# Altium PCB 电子脚铐便携式主控板V3-改版V1.PcbDoc (part 3 of 3)
Units mm, origin at the board's own origin, x right, y up, seen from the top; angles counter-clockwise.
Board outline 54 x 105 mm, 2 copper layers (Top Layer, Bottom Layer), stack 1.271 mm thick; 103 components, 64 nets, 340 pads, 43 vias.
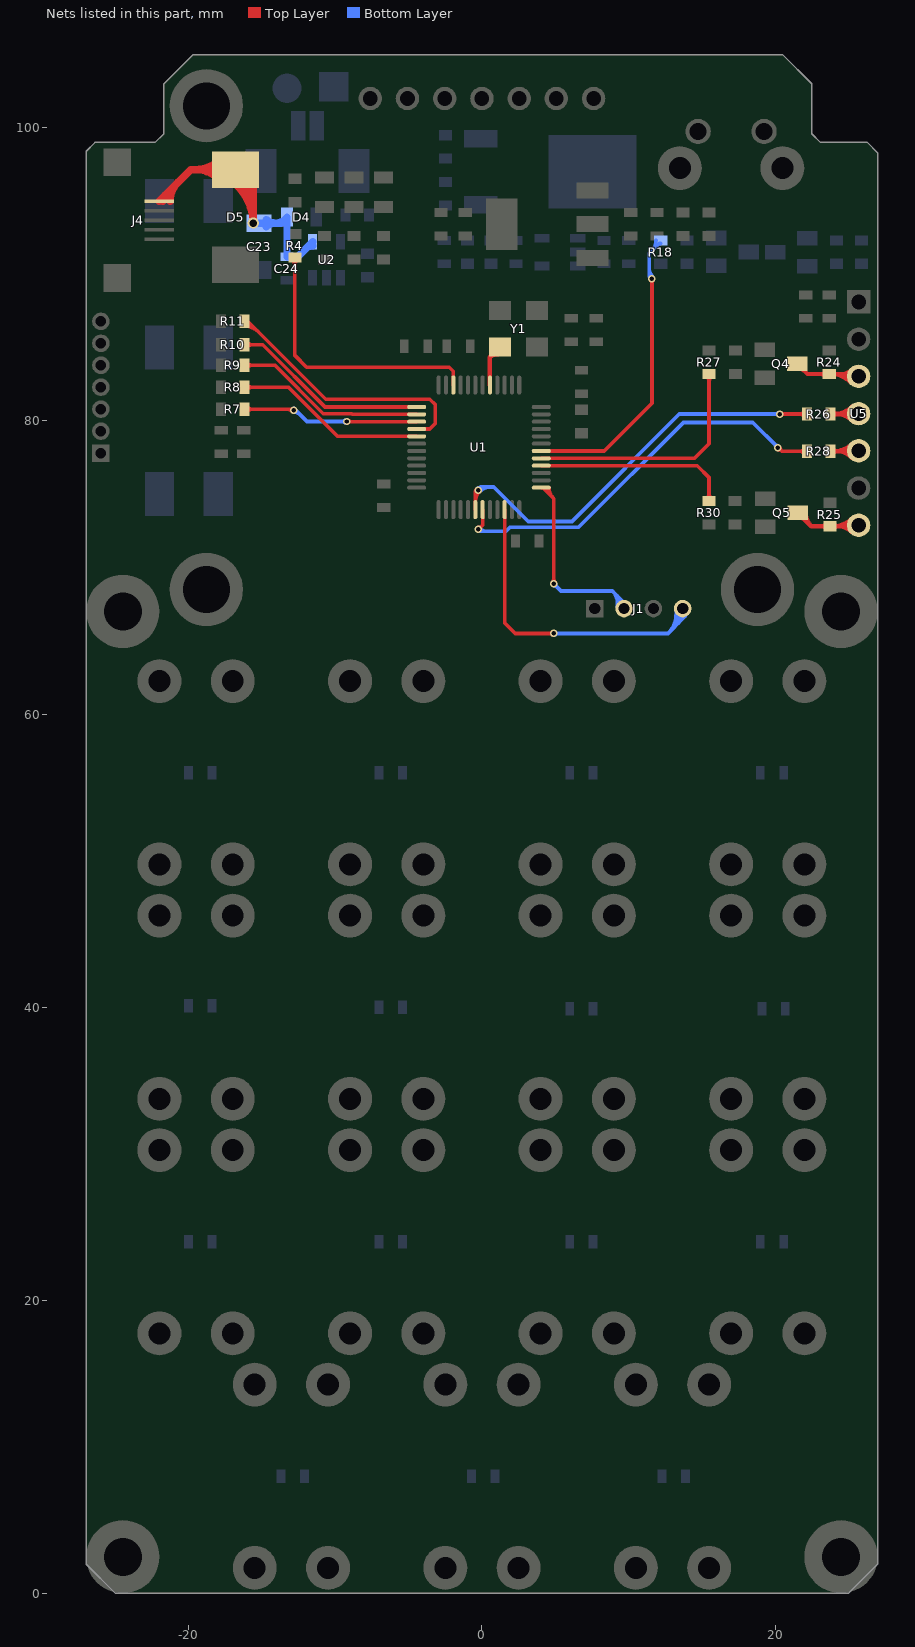
[diagram p3: the nets of this part, all layers, seen from the top]

## Via types
v1: diameter 0.508, hole 0.305, Top Layer to Bottom Layer, tented both sides, 29 vias
v2: diameter 0.762, hole 0.508, Top Layer to Bottom Layer, tented both sides, 14 vias

## Nets (pads, with @x,y where several pads share a name; then routed paths per layer and width w, separated by ;. In a path a pad name is that pad's centre, name@x,y a point inside that pad or via, vN(x,y) a via of type N, cw(c..) or ccw(c..) an arc to the next point about the centre after c; other vN are vias at no path point) (continued)
POWEN: R18.1 U1.42 | length 22.3
  Top Layer w0.254: U1.42@4.05,77.95 8.35,77.95 11.6,81.2 v1(11.6,89.7) ; v1@11.51,89.61 cw(c11.293,89.393) 11.6,89.393 cw(c11.907,89.393) v1@11.69,89.61
  Bottom Layer w0.254: 11.408,90.47 ccw(c12.37,90.47) v1@11.69,89.79 ; 11.564,91.564 ccw(c10.81,92.319) R18.1@11.877,92.319 ; v1(11.6,89.7) 11.408,89.892 11.408,91.408 12.1,92.1 R18.1@12.2,92.1
SETA: R27.2 U1.41 | length 17.5
  Top Layer w0.254: U1.41@4.05,77.45 14.505,77.45 15.5,78.445 R27.2@15.5,83.2 ; R27.2@15.342,83.042 cw(c14.962,82.662) 15.5,82.662 cw(c16.038,82.662) R27.2@15.658,83.042
SETAOUT: Q4.3 R24.1 U5.3 | length 11
  Top Layer w0.254: Q4.3@21.5,83.9 22.2,83.2 ; Q4.3@21.7,83.527 cw(c21.7,83.109) Q4.3@21.995,83.405 ; Q4.3@22.056,83.788 ccw(c22.613,83.613) 22.2,83.2 ; R24.1@23.442,83.042 ccw(c23.062,82.662) 23.062,83.2 ccw(c23.062,83.738) R24.1@23.442,83.358 ; R24.1@23.7,83.2 cw(c23.7,81.056) U5.3@25.222,82.566 ; R24.1@23.958,83.042 cw(c24.338,82.662) 24.338,83.2 cw(c24.338,83.738) R24.1@23.958,83.358 ; 24.31,83.2 cw(c24.31,81.661) U5.3@25.403,82.745 ; 24.462,83.2 ccw(c24.462,84.278) U5.3@25.224,83.516 ; U5.3@25.7,83.04 25.54,83.2 R24.1@23.7,83.2 22.2,83.2
SETB: R30.2 U1.40 | length 14.1
  Top Layer w0.254: U1.40@4.05,76.95 14.697,76.95 15.5,76.147 R30.2@15.5,74.7 ; R30.2@15.336,74.698 ccw(c14.941,75.093) 15.5,75.093 ; 15.5,75.064 ccw(c16.018,75.064) R30.2@15.652,74.698
SETBOUT: Q5.3 R25.1 U5.7 | length 10.7
  Top Layer w0.305: Q5.3@21.547,73.74 22.474,72.813 ; Q5.3@21.747,73.392 cw(c21.747,73.036) Q5.3@21.999,73.288 ; Q5.3@22.095,73.738 ccw(c23.39,73.729) 22.474,72.813 ; R25.1@23.509,72.673 ccw(c23.172,72.336) 23.172,72.813 ccw(c23.172,73.29) R25.1@23.509,72.953 ; R25.1@23.975,72.813 ccw(c23.975,74.605) U5.7@25.242,73.338 ; R25.1@23.989,72.673 cw(c24.326,72.336) 24.326,72.813 cw(c24.326,73.29) R25.1@23.989,72.953 ; 24.298,72.813 cw(c24.298,71.478) U5.7@25.242,72.422 ; 24.711,72.813 ccw(c24.711,73.869) U5.7@25.458,73.122 ; U5.7@25.7,72.88 25.633,72.813 R25.1@23.749,72.813 22.474,72.813
SPARE1: R4.2 U1.10 | length 19.7
  Top Layer w0.254: R4.2@-12.92,90.989 cw(c-13.3,90.609) -12.762,90.609 cw(c-12.224,90.609) R4.2@-12.604,90.989 ; R4.2@-12.762,91.147 -12.762,84.47 -11.96,83.668 -2.225,83.668 -1.95,83.393 U1.10@-1.95,82.45
SPI_DC: R10.1 U1.13 | length 14.4
  Top Layer w0.254: R10.1@-16.2,85.2 -14.949,85.2 -10.699,80.95 U1.13@-4.45,80.95 ; R10.1@-16.042,85.042 cw(c-15.662,84.662) -15.662,85.2 cw(c-15.662,85.738) R10.1@-16.042,85.358
SPI_MISO: R11.1 U1.16 | length 19.7
  Top Layer w0.254: R11.1@-16.2,86.477 cw(c-16.2,85.153) -15.264,86.089 ; R11.1@-16.2,86.731 cw(c-16.2,86.02) -15.697,86.523 ; R11.1@-16.2,86.8 -15.975,86.8 -10.662,81.487 -3.556,81.487 -3.175,81.106 -3.175,79.836 -3.561,79.45 U1.16@-4.45,79.45
SPI_MOSI: R8.1 U1.17 | length 14
  Top Layer w0.254: R8.1@-16.2,82.3 -13.2,82.3 -9.85,78.95 U1.17@-4.45,78.95 ; R8.1@-16.042,82.142 cw(c-15.662,81.762) -15.662,82.3 cw(c-15.662,82.838) R8.1@-16.042,82.458
SPI_RES: R9.1 U1.14 | length 14
  Top Layer w0.254: R9.1@-16.2,83.8 -14.124,83.8 -10.82,80.496 -8.89,80.496 -8.844,80.45 U1.14@-4.45,80.45 ; R9.1@-16.042,83.642 cw(c-15.662,83.262) -15.662,83.8 cw(c-15.662,84.338) R9.1@-16.042,83.958
SPI_SCK: R7.1 U1.15 | length 15
  Top Layer w0.254: R7.1@-16.2,80.8 -12.902,80.8 v1(-12.827,80.725) ; R7.1@-16.042,80.642 cw(c-15.662,80.262) -15.662,80.8 cw(c-15.662,81.338) R7.1@-16.042,80.958 ; -13.315,80.8 cw(c-13.315,80.237) v1@-12.917,80.635 ; v1(-9.237,79.963) -9.25,79.95 U1.15@-4.45,79.95 ; v1@-9.147,79.873 cw(c-8.962,79.688) -8.962,79.95 ; v1@-9.147,80.053 ccw(c-8.899,80.301) -8.899,79.95
  Bottom Layer w0.254: v1@-12.827,80.598 cw(c-12.827,79.985) -12.393,80.418 ; v1(-12.827,80.725) -12.827,80.852 -11.938,79.963 v1(-9.237,79.963) ; v1@-9.327,79.873 ccw(c-9.544,79.656) -9.544,79.963 ccw(c-9.544,80.27) v1@-9.327,80.053
SWCLK: J1.2 U1.37 | length 16.9
  Top Layer w0.254: U1.37@4.05,75.45 4.15,75.45 4.9,74.7 v1(4.9,68.9) ; U1.37@4.319,75.45 ccw(c4.727,75.45) 4.439,75.161 ; U1.37@4.573,75.45 ccw(c5.594,75.45) 4.872,74.728 ; v1@4.81,68.99 ccw(c4.593,69.207) 4.9,69.207 ccw(c5.207,69.207) v1@4.99,68.99
  Bottom Layer w0.254: v1@4.9,68.773 cw(c4.9,68.466) 5.117,68.683 cw(c5.334,68.9) v1@5.027,68.9 ; v1(4.9,68.9) 5.4,68.4 8.9,68.4 ; 9.236,68.064 cw(c8.592,67.42) J1.2@9.485,67.243 ; J1.2@9.236,67.292 ccw(c8.032,67.532) 8.9,68.4 ; J1.2@9.7,67.2 9.7,67.6 8.9,68.4
SWDIO: J1.4 U1.34 | length 28
  Top Layer w0.254: U1.34@1.55,73.95 1.55,66.225 2.275,65.5 v1(4.9,65.5) ; v1@4.81,65.41 ccw(c4.593,65.193) 4.593,65.5 ccw(c4.593,65.807) v1@4.81,65.59
  Bottom Layer w0.254: v1(4.9,65.5) 12.7,65.5 ; v1@4.99,65.41 cw(c5.207,65.193) 5.207,65.5 cw(c5.207,65.807) v1@4.99,65.59 ; 13.054,65.854 ccw(c11.975,66.934) J1.4@13.484,67.167 ; J1.4@13.233,67.128 cw(c11.361,66.839) 12.7,65.5 ; 13.409,66.209 ccw(c12.589,67.028) J1.4@13.735,67.205 ; J1.4@13.524,66.761 cw(c13.419,66.5) 13.7,66.5 ; J1.4@13.7,67.2 13.7,66.5 ; 13.763,66.563 ccw(c13.202,67.123) J1.4@13.986,67.244 ; J1.4@13.876,66.761 ccw(c13.981,66.5) 13.7,66.5 ; 12.7,65.5 13.7,66.5
TTL1_RX: R28.2 U1.31 | length 30.7
  Top Layer w0.254: v1(-0.254,72.597) 0.05,72.901 U1.31@0.05,73.95 ; v1@-0.254,72.724 ccw(c-0.254,73.031) -0.037,72.814 ccw(c0.18,72.597) v1@-0.127,72.597 ; v1@20.193,78.058 cw(c20.193,77.679) 20.461,77.947 ; v1@20.208,78.2 20.477,77.931 R28.2@22.187,77.931 ; v1@20.32,78.185 ccw(c20.554,78.185) 20.389,78.019 ; R28.2@22.029,77.773 ccw(c21.649,77.393) 21.649,77.931 ccw(c21.649,78.469) R28.2@22.029,78.089
  Bottom Layer w0.254: v1(-0.254,72.597) -0.127,72.47 1.641,72.47 1.911,72.74 6.585,72.74 13.746,79.9 18.478,79.9 v1(20.193,78.185) ; v1@-0.164,72.687 ccw(c0.359,73.21) 0.359,72.47 ; v1@20.066,78.185 ccw(c19.759,78.185) 19.976,78.402 ccw(c20.193,78.619) v1@20.193,78.312
TTL1_TX: R26.2 U1.30 | length 32.5
  Top Layer w0.254: U1.30@-0.45,73.95 -0.45,75.068 ; U1.30@-0.45,74.484 cw(c0.526,74.484) v1@-0.164,75.174 ; -0.45,75.097 cw(c-0.087,75.097) v1@-0.344,75.354 ; v1@-0.381,75.255 cw(c-0.619,75.237) -0.45,75.068 ; v1@-0.263,75.137 ccw(c-0.281,74.899) -0.45,75.068 ; v1(-0.254,75.264) -0.45,75.068 ; v1(20.32,80.471) R26.2@22.187,80.471 ; v1@20.41,80.381 cw(c20.627,80.164) 20.627,80.471 cw(c20.627,80.778) v1@20.41,80.561 ; R26.2@22.029,80.313 ccw(c21.649,79.933) 21.649,80.471 ccw(c21.649,81.009) R26.2@22.029,80.629
  Bottom Layer w0.254: v1@-0.344,75.354 cw(c0.009,75.001) 0.009,75.5 ; v1(-0.254,75.264) -0.018,75.5 0.8,75.5 3.154,73.146 6.146,73.146 13.471,80.471 v1(20.32,80.471) ; v1@-0.164,75.174 cw(c0.622,74.388) 0.622,75.5 ; v1@20.23,80.381 ccw(c20.013,80.164) 20.013,80.471 ccw(c20.013,80.778) v1@20.23,80.561
VBUS: C23.1 C24.1 D4.1 D5.1 J4.1 U2.4 | length 33.8
  Top Layer w0.508: J4.1@-22.021,95 -19.871,97.15 D5.1@-16.8,97.15 -15.6,95.95 v2(-15.6,93.5) ; J4.1@-21.783,95 cw(c-21.208,95) -21.615,95.406 ; J4.1@-21.275,95 cw(c-19.474,95) -20.748,96.274 ; D5.1@-17.854,96.446 ccw(c-19.555,94.745) -19.555,97.15 ccw(c-19.555,99.555) D5.1@-17.854,97.854 ; D5.1@-17.057,96.36 cw(c-19.331,93.402) v2@-15.6,93.402 ; D5.1@-16.747,96.763 cw(c-18.538,94.434) -15.6,94.434 ; D5.1@-16.438,97.166 cw(c-17.745,95.465) -15.6,95.465
  Bottom Layer w0.508: v2(-15.6,93.5) -13.7,93.5 D4.1@-13.3,93.9 C24.1@-13.3,91.2 -12.575,91.2 U2.4@-11.55,92.225 ; C23.1@-14.705,93.255 cw(c-14.115,92.665) -14.115,93.5 cw(c-14.115,94.335) C23.1@-14.705,93.745 ; -14.015,93.5 ccw(c-14.015,94.365) D4.1@-13.403,93.753 ; -12.013,91.762 cw(c-11.55,91.3) U2.4@-11.55,91.954
XTAL: U1.5 Y1.3 | length 4.1
  Top Layer w0.305: U1.5@0.55,82.45 0.55,84.35 ; Y1.3@0.678,84.892 cw(c0.175,84.725) 0.55,84.35 ; Y1.3@1.108,84.554 ccw(c1.049,83.851) 0.55,84.35 ; Y1.3@1.25,85.05 0.55,84.35
YL_RX: R26.1 U5.4 | length 5.8
  Top Layer w0.305: R26.1@23.787,80.471 U5.4@25.671,80.471 ; R26.1@23.927,80.331 cw(c24.264,79.994) 24.264,80.471 cw(c24.264,80.948) R26.1@23.927,80.611 ; R26.1@24.067,80.471 ccw(c24.067,82.133) U5.4@25.242,80.958 ; 24.207,80.471 cw(c24.207,79.007) U5.4@25.242,80.042 ; 24.802,80.471 ccw(c24.802,81.398) U5.4@25.458,80.742
YL_TX: R28.1 U5.5 | length 5.8
  Top Layer w0.305: R28.1@23.787,77.931 U5.5@25.671,77.931 ; R28.1@23.927,77.791 cw(c24.264,77.454) 24.264,77.931 cw(c24.264,78.408) R28.1@23.927,78.071 ; R28.1@24.067,77.931 ccw(c24.067,79.593) U5.5@25.242,78.418 ; 24.207,77.931 cw(c24.207,76.467) U5.5@25.242,77.502 ; 24.802,77.931 ccw(c24.802,78.858) U5.5@25.458,78.202
pads on no net: J3.3 J3.4 J4.2 J4.3 J4.4 R5.1 S16.0 U1.2 U1.3 U1.4 U1.6 U5.6 Y1.1

## Keep-outs
Keep-Out Layer:
  the board outline again, w0.127

## Other copper
Bottom Layer:
  rectangle net GND: -3.671,90.504 -2.54,91.012

## Silkscreen, mask and mechanical layers (free items; w line width, h text height)
Top Overlay:
  text "+" at 4.4,66.5 h1.52
Bottom Overlay:
  lines w4.5: -20,75 -20,105
  text "-" at -14.3,103.1 h1.52
  text "+" at -7.7,103.1 h1.52
  text "+" at 4.4,66.5 h1.52